# Altium PCB MB1293Cascii.PcbDoc (part 2 of 2)
Units mm, origin at the board's own origin, x right, y up, seen from the top; angles counter-clockwise.
Board outline 50.63 x 26.23 mm, 2 copper layers (Top Layer, Bottom Layer), stack 1.571 mm thick; 73 components, 55 nets, 560 pads, 45 vias.
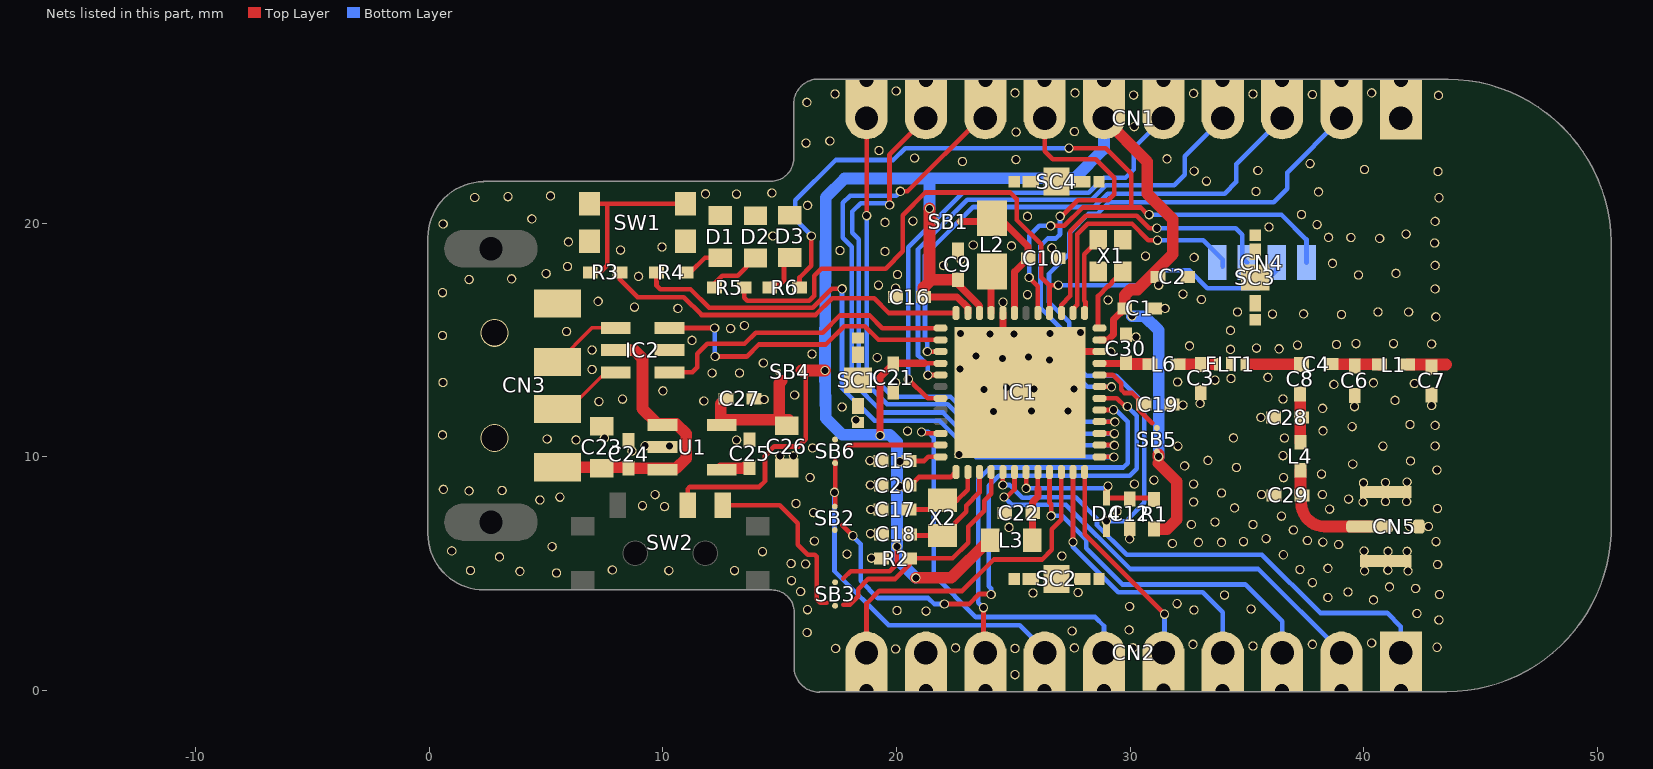
[diagram p2: the nets of this part, all layers, seen from the top]

## Via types
v1: diameter 0.4, hole 0.3, Top Layer to Bottom Layer, tented both sides, 45 vias

## Nets (pads, with @x,y where several pads share a name; then routed paths per layer and width w, separated by ;. In a path a pad name is that pad's centre, name@x,y a point inside that pad or via, vN(x,y) a via of type N, cw(c..) or ccw(c..) an arc to the next point about the centre after c; other vN are vias at no path point)
3V3: C1.2 C2.2 C9.1 C15.1 C16.1 C20.2 C21.2 CN1.6 IC1.1 IC1.23 IC1.34 IC1.35 IC1.40 IC1.48 L3.1 pad.2@28.88,26.121 pad.41 pad.42 pad.65 pad.582 R1.1 SB1.2 SB3.1 SB4.1 SB5.2 SW2.2 | length 95.1
  Top Layer w0.2: SW2.2@11.07,7.931 11.07,8.63 11.157,8.717 14.122,8.717 14.376,8.971 14.376,10.058 14.769,10.451 15.81,10.451 16.12,10.76 16.12,13.681 ; 17.729,4.801 18.039,5.11 19.71,5.11 20.015,5.415 v1(20.015,6.172) v1@20.015,6.177 ; C15.1@20.489,9.831 21.18,9.831 21.358,10.009 IC1.48@21.891,10.009 ; C20.2@20.499,8.691 20.949,9.141 22.322,9.141 IC1.1@22.543,9.362 ; 21.207,14.009 IC1.40@21.891,14.009
  Top Layer w0.3: pad.582@19.304,10.922 19.304,13.426 C21.2@19.863,13.985 19.889,14.011 21.207,14.011 ; C16.1@21.159,16.841 22.598,16.841 23.051,16.388 IC1.35@23.051,16.159 ; 21.412,17.506 21.488,17.582 ; C9.1@22.631,17.582 22.439,17.582 23.551,16.47 IC1.34@23.551,16.159 ; IC1.23@28.689,15.009 29.055,15.009 29.286,15.24 29.286,15.875 C1.2@29.769,16.358
  Top Layer w0.5: SB4.1@15.934,13.701 v1(16.942,13.701) ; v1(20.828,4.826) 22.345,4.826 23.96,6.441 L3.1@24.008,6.441 ; C16.1@21.159,16.841 21.159,17.252 21.412,17.506 v1(21.412,20.63) 21.412,20.096 21.463,20.046 21.59,20.046 ; 21.488,17.582 C9.1@22.439,17.582 ; CN1.6@28.88,24.491 30.734,22.636 30.734,21.26 31.826,20.168 31.826,18.669 30.325,17.168 30.021,17.168 29.769,16.916 C1.2@29.769,16.358 ; R1.1@31.02,6.916 31.025,6.911 31.574,6.911 31.99,7.326 31.99,8.951 31.21,9.731 ; v1@31.21,10.013 v1@31.21,10.109
  Bottom Layer w0.5: v1(20.015,6.172) 20.015,5.639 v1(20.828,4.826) ; v1@20.02,6.191 20.02,10.651 19.718,10.952 17.673,10.952 16.967,11.659 v1(16.942,13.701) 16.967,21.105 17.779,21.916 21.412,21.916 ; v1(21.412,20.63) 21.412,21.92 27.619,21.92 28.88,23.181 CN1.6@28.88,24.451 ; pad.65@30.074,16.027 30.607,16.027 31.217,15.418 v1(31.217,10.013)
  other v1: 31.217,17.348
5V_USB: C23.2 C24.2 CN3.1 IC2.5 U1.1 U1.3 | length 12.4
  Top Layer w0.5: CN3.1@5.5,9.561 C24.2@8.641,9.561 ; IC2.5@7.99,14.571 8.79,14.571 9.13,14.231 9.13,12.071 9.79,11.411 10.58,11.411 10.998,10.992 10.998,9.936 10.582,9.521 C24.2@8.681,9.521 ; C24.2@8.68,9.522 C24.2@8.681,9.521
ANT: C7.2 L1.2 | length 1.7
  Top Layer w0.4: 43.519,13.954 43.536,13.97
  Top Layer w0.5: L1.2@41.869,13.954 43.519,13.954
BOOT0: IC1.4 R2.1 SB3.2 SW2.3 | length 18
  Top Layer w0.2: SW2.3@12.57,7.931 15,7.931 15.77,7.161 15.77,6.248 16.201,5.818 16.509,5.818 16.586,5.74 16.586,3.912 16.739,3.759 17.018,3.759 ; 17.729,3.683 18.009,3.683 18.364,4.039 18.364,4.343 18.801,4.78 19.939,4.78 20.565,5.407 20.565,5.661 22.398,5.661 23.075,6.338 23.075,7.023 23.76,7.708 23.76,8.131 24.051,8.421 IC1.4@24.051,9.362
GND: C1.1 C2.1 C3.1 C6.2 C7.1 C9.2 C10.2 C12.2 C15.2 C16.2 C17.2 C18.2 C19.2 C20.1 C21.1 C22.2 C23.1 C24.1 C25.1 C26.1 C27.1 C28.2 C29.2 C30.1 CN1.1 CN2.9 CN3.0 CN3.4 CN5.2 D1.K D2.K D3.K FLT1.2 IC1.22 IC1.32 IC1.49 IC2.2 pad.2@21.26,-0.005 pad.2@41.58,26.136 pad.24 pad.25 pad.26 pad.27 pad.28 pad.29 pad.30 pad.31 pad.32 pad.33 pad.34 pad.35 pad.36 pad.37 pad.38 pad.39 pad.40 pad.43 pad.44 pad.45 pad.46 pad.47 pad.48 pad.49 pad.50 pad.51 pad.52 pad.53 pad.54 pad.55 pad.56 pad.57 pad.58 pad.59 pad.60 pad.61 pad.62 pad.63 pad.64 pad.69 pad.70 pad.71 pad.74 pad.76 pad.77 pad.78 pad.79 pad.80 pad.81 pad.82 pad.83 pad.84 pad.85 pad.86 pad.87 pad.88 pad.89 pad.90 pad.91 pad.92 pad.93 pad.94 pad.95 pad.96 pad.97 pad.99 pad.100 pad.101 pad.102 pad.103 pad.104 pad.105 pad.106 pad.107 pad.108 pad.109 pad.110 pad.111 pad.112 pad.113 pad.114 pad.115 pad.116 pad.117 pad.118 pad.119 pad.120 pad.121 pad.122 pad.123 pad.124 pad.125 pad.126 pad.127 pad.128 pad.129 pad.130 pad.131 pad.132 pad.133 pad.134 pad.135 pad.136 pad.137 pad.138 pad.139 pad.142 pad.143 pad.144 pad.145 pad.146 pad.147 pad.148 pad.149 pad.150 pad.151 pad.152 pad.153 pad.154 pad.155 pad.156 pad.157 pad.158 pad.159 pad.160 pad.161 pad.162 pad.163 pad.164 pad.165 pad.166 pad.167 pad.168 pad.169 pad.170 pad.171 pad.172 pad.173 pad.174 pad.175 pad.176 pad.177 pad.178 pad.179 pad.180 pad.181 pad.182 pad.183 pad.184 pad.185 pad.186 pad.187 pad.188 pad.189 pad.190 pad.191 pad.192 pad.193 pad.194 pad.195 pad.196 pad.197 pad.198 pad.199 pad.200 pad.201 pad.202 pad.203 pad.204 pad.205 pad.206 pad.207 pad.208 pad.209 pad.210 pad.211 pad.212 pad.213 pad.214 pad.215 pad.216 pad.217 pad.218 pad.219 pad.220 pad.221 pad.222 pad.223 pad.224 pad.225 pad.226 pad.227 pad.228 pad.229 pad.230 pad.231 pad.232 pad.233 pad.234 pad.235 pad.236 pad.237 pad.238 pad.239 pad.240 pad.241 pad.242 pad.243 pad.244 pad.245 pad.246 pad.247 pad.248 pad.249 pad.250 pad.251 pad.252 pad.253 pad.254 pad.255 pad.256 pad.257 pad.258 pad.259 pad.260 pad.261 pad.262 pad.263 pad.264 pad.265 pad.266 pad.267 pad.268 pad.269 pad.270 pad.271 pad.272 pad.273 pad.274 pad.275 pad.276 pad.277 pad.278 pad.279 pad.280 pad.281 pad.282 pad.283 pad.284 pad.285 pad.286 pad.287 pad.288 pad.289 pad.290 pad.291 pad.292 pad.293 pad.294 pad.295 pad.296 pad.297 pad.298 pad.299 pad.300 pad.301 pad.302 pad.303 pad.304 pad.305 pad.306 pad.307 pad.308 pad.309 pad.310 pad.311 pad.312 pad.313 pad.314 pad.315 pad.317 pad.318 pad.319 pad.320 pad.321 pad.323 pad.324 pad.325 pad.326 pad.327 pad.328 pad.329 pad.330 pad.583 pad.585 pad.586 pad.587 pad.588 pad.589 pad.590 R2.2 SC1.1 SC2.1 SC3.1 SC4.1 SW1.1 U1.2 X1.2 X1.4 | length 7.8
  Top Layer w0.3: IC1.32@24.551,16.159 24.551,13.5 IC1.49@25.29,12.761 27.038,14.509 IC1.22@28.689,14.509
NetC3_2: C3.2 FLT1.1 L6.2 | length 1.5
  Top Layer w0.5: L6.2@32.07,13.97 FLT1.1@33.604,13.97
NetC4_1: C4.1 C8.1 FLT1.3 | length 2.3
  Top Layer w0.5: 35.027,13.97 C4.1@37.331,13.97
NetC4_2: C4.2 C6.1 L1.1 | length 2.1
  Top Layer w0.5: C4.2@38.605,13.974 40.623,13.974 cw(c40.623,13.905) L1.1@40.671,13.954
NetC8_2: C8.2 C28.1 L4.1 | length 2.1
  Top Layer w0.5: C28.1@37.269,11.684 cw(c37.242,11.657) 37.28,11.657 L4.1@37.28,10.633 ; C28.1@37.27,11.685 C8.2@37.27,12.689
NetC10_1: C10.1 IC1.31 L2.1 SB1.1 | length 6.6
  Top Layer w0.3: SB1.1@22.725,20.071 23.94,20.071 L2.1@24.09,20.221 24.412,20.221 25.629,19.004 25.635,19.01 C10.1@25.635,18.501 25.072,17.937 25.051,17.937 IC1.31@25.051,16.159
NetC12_1: C12.1 D4.A IC1.7 R1.2 | length 6.8
  Top Layer w0.2: v1@25.551,8.661 IC1.7@25.551,9.362 ; v1(29.05,8.751) 28.98,8.681 D4.A@28.98,8.246 30.96,8.246 R1.2@31.02,8.186
  Bottom Layer w0.2: v1(25.55,8.661) 28.96,8.661 v1(29.05,8.751)
NetC17_1: C17.1 IC1.2 X2.1 | length 3.6
  Top Layer w0.2: C17.1@20.549,7.751 21.58,7.751 X2.1@21.97,8.141 22.59,8.141 23.051,8.601 IC1.2@23.051,9.362
NetC18_1: C18.1 IC1.3 X2.2 | length 4.8
  Top Layer w0.2: C18.1@20.559,6.691 20.609,6.641 X2.2@21.97,6.641 22.99,7.661 22.99,7.921 23.551,8.481 IC1.3@23.551,9.362
NetC19_1: C19.1 IC1.20 SB5.1 | length 3.5
  Top Layer w0.2: IC1.20@28.689,13.509 29.257,13.509 29.616,13.15 29.616,12.878 29.756,12.738 30.083,12.738 30.34,12.482 30.34,12.051 30.94,11.451
NetC22_1: C22.1 IC1.8 L3.2 | length 3
  Top Layer w0.2: 26.051,8.661 IC1.8@26.051,9.362
  Top Layer w0.3: L3.2@25.812,6.441 25.812,8.062 26.051,8.301 26.051,8.661
NetC25_2: C25.2 U1.4 | length 1
  Top Layer w0.5: U1.4@12.48,9.521 13.459,9.521 C25.2@13.47,9.532
NetC26_2: C26.2 C27.2 SB4.2 U1.5 | length 5.9
  Top Layer w0.5: C27.2@12.701,12.491 12.48,12.27 12.48,11.421 12.65,11.591 C26.2@14.98,11.591 ; 15.088,13.259 14.98,13.151 C26.2@14.98,11.591 ; C26.2@15.392,11.591 C26.2@14.98,11.591
NetC29_1: C29.1 CN5.1 L4.2 | length 4.9
  Top Layer w0.5: L4.2@37.289,9.426 37.289,8.394 37.32,8.363 37.32,8.024 ccw(c38.32,8.024) 38.32,7.024 CN5.1@40.244,7.024
NetC30_2: C30.2 IC1.21 L6.1 | length 2.1
  Top Layer w0.3: IC1.21@28.689,14.009 C30.2@29.87,14.009
  Top Layer w0.5: C30.2@29.87,13.981 L6.1@30.836,13.981
NetCN2_7: CN2.7 pad.2@26.34,-0.005 SB2.1 SB6.1 | length 17.4
  Top Layer w0.2: SB2.1@17.374,7.917 17.374,9.863
  Bottom Layer w0.2: v1(17.348,8.484) 17.348,5.105 19.66,2.794 25.273,2.794 26.34,1.727 CN2.7@26.34,1.631 pad.2@26.34,-0.005
NetCN3_2: CN3.2 IC2.6 | length 3.1
  Top Layer w0.15: CN3.2@5.5,12.061 6,12.061 7.56,13.621 IC2.6@7.99,13.621
NetCN3_3: CN3.3 IC2.4 | length 3.1
  Top Layer w0.15: CN3.3@5.5,14.061 6.96,15.521 IC2.4@7.99,15.521
NetCN4_1: CN4.1 IC1.26 | length 10.8
  Top Layer w0.2: IC1.26@27.551,16.159 27.551,16.317 27.74,16.506 27.74,19.538 28.186,19.983 30.077,19.983 30.782,19.279 v1(31.166,19.279)
  Bottom Layer w0.2: v1(31.166,19.279) 33.122,19.279 33.96,18.44 CN4.1@33.96,18.141
NetCN4_2: CN4.2 IC1.27 | length 12.9
  Top Layer w0.2: IC1.27@27.051,16.159 27.051,16.501 27.44,16.891 27.44,19.662 28.098,20.32 30.277,20.32 30.81,19.787 v1(31.14,19.787)
  Bottom Layer w0.2: v1(31.14,19.787) 34.519,19.787 34.794,19.511 34.794,18.521 CN4.2@35.001,18.313
NetD1_A: D1.A R4.2 | length 1.7
  Top Layer w0.15: R4.2@11.005,17.901 R4.2@11.18,17.901
  Top Layer w0.2: R4.2@11.18,17.901 11.807,18.528 D1.A@12.466,18.528
NetD2_A: D2.A R5.2 | length 2.5
  Top Layer w0.2: R5.2@12.116,17.145 12.116,17.323 12.548,17.755 13.203,17.755 D2.A@13.966,18.518
NetD3_A: D3.A R6.2 | length 1.7
  Top Layer w0.2: R6.2@14.605,17.399 15.037,17.399 15.189,17.551 15.189,18.301 D3.A@15.426,18.538
NetIC1_24: IC1.24 X1.3 | length 2.9
  Top Layer w0.2: IC1.24@28.689,15.509 28.626,15.572 28.626,16.885 29.059,17.318 29.092,17.318 29.209,17.435 29.209,17.468 X1.3@29.684,17.943
NetIC1_25: IC1.25 X1.1 | length 3.5
  Top Layer w0.2: IC1.25@28.051,16.159 28.09,16.198 28.09,16.628 28.04,16.678 28.04,18.667 X1.1@28.702,19.329
NetIC1_33: IC1.33 L2.2 | length 2.3
  Top Layer w0.3: L2.2@23.72,17.661 24.051,17.661 IC1.33@24.051,16.159 ; L2.2@24.09,17.935 L2.2@24.09,18.389
NetR3_1: R3.1 SW1.2 | length 7.6
  Top Layer w0.2: SW1.2@6.87,20.831 7.63,20.831 ; R3.1@6.895,17.901 7.33,17.901 7.63,18.201 7.63,20.831 ; SW1.2@10.97,20.831 7.63,20.831
NRST: CN1.2 D4.K pad.2@39.04,26.136 | length 32
  Top Layer w0.2: CN1.2@39.04,24.491 pad.2@39.04,26.136
  Bottom Layer w0.2: v1(28.98,7.251) 29.82,7.251 30.607,8.038 30.607,12.273 29.41,13.471 28.121,13.471 27.39,14.202 27.39,15.765 26.524,16.631 26.524,17.829 27.39,18.694 27.39,19.571 28.217,20.397 28.591,20.397 29.094,20.901 36.141,20.901 36.72,21.48 36.72,22.171 CN1.2@39.04,24.491
PA0: CN2.3 IC1.9 pad.2@36.5,-0.005 | length 15.2
  Top Layer w0.2: IC1.9@26.551,9.362 26.551,8.051 26.62,7.981 v1(26.62,7.481)
  Bottom Layer w0.2: v1(26.62,7.481) 27.089,7.481 28.118,6.452 28.118,6.096 29.667,4.547 34.925,4.547 36.5,2.972 CN2.3@36.5,1.631
PA1: CN2.10 IC1.10 pad.2@18.72,-0.005 | length 14.7
  Top Layer w0.2: pad.2@18.72,1.422 18.72,3.731 19.256,4.267 22.809,4.267 24.155,5.613 26.238,5.613 26.65,6.025 26.65,6.911 27.051,7.311 IC1.10@27.051,9.362
PA2: CN2.4 IC1.11 pad.2@33.96,-0.005 | length 12.5
  Top Layer w0.2: v1(27.55,6.361) IC1.11@27.551,9.362
  Bottom Layer w0.2: v1(27.55,6.361) 27.55,6.156 29.489,4.216 33.096,4.216 33.96,3.353 CN2.4@33.96,1.631
PA3: CN2.5 IC1.12 pad.2@31.42,0.01 | length 9.2
  Top Layer w0.2: IC1.12@28.051,9.362 28.051,6.7 29.23,5.521 29.23,5.517 v1(31.471,3.277)
  Bottom Layer w0.2: CN2.5@31.42,1.631 31.471,1.681 v1(31.471,3.277)
PA4: IC1.13 R4.1 | length 27
  Top Layer w0.2: R4.1@9.735,17.901 9.735,17.336 9.9,17.17 11.187,17.17 11.979,16.378 16.411,16.378 17.229,17.196 v1(17.678,17.196) ; IC1.13@28.689,10.009 29.298,10.009 29.3,10.007 v1(29.3,10.001)
  Bottom Layer w0.2: v1(17.678,17.196) 17.67,17.187 17.67,12.942 19.061,11.551 21.84,11.551 23.39,10.001 v1(29.3,10.001) v1@29.31,10.011
PA5: CN1.8 IC1.14 pad.2@23.8,26.136 | length 29.8
  Top Layer w0.2: v1(20.168,21.366) 20.472,21.366 23.597,24.491 CN1.8@23.8,24.491 pad.2@23.8,25.872 ; IC1.14@28.689,10.509 29.318,10.509 29.32,10.507 v1(29.32,10.501)
  Bottom Layer w0.2: v1(20.168,21.366) 19.983,21.182 18.013,21.182 17.704,20.873 17.704,19.385 18.09,18.999 18.09,16.345 18.09,13.234 19.423,11.901 21.99,11.901 23.39,10.501 v1(29.32,10.501)
PA6: CN1.9 IC1.15 pad.2@21.26,26.136 | length 28.9
  Top Layer w0.2: v1@19.7,20.793 v1(19.71,20.782) ; v1@19.7,20.851 19.7,22.931 CN1.9@21.26,24.491 pad.2@21.26,26.136 ; IC1.15@28.689,11.009 29.318,11.009 29.32,11.007 v1(29.32,11.001)
  Bottom Layer w0.2: v1(19.71,20.782) 19.71,20.858 18.465,20.858 18.11,20.504 18.11,19.588 18.39,19.309 18.39,16.221 18.39,13.467 19.596,12.261 22.2,12.261 23.46,11.001 v1(29.32,11.001) ; CN1.9@21.26,24.491 pad.2@21.26,25.872
PA7: CN1.10 IC1.16 pad.2@18.72,26.136 | length 24.4
  Top Layer w0.2: pad.2@18.72,25.872 CN1.10@18.72,24.491 18.726,24.485 v1(18.726,20.326) ; IC1.16@28.689,11.509 29.331,11.509 v1(29.34,11.501)
  Bottom Layer w0.2: v1(18.726,20.326) 18.726,13.69 19.843,12.573 22.312,12.573 23.384,11.501 v1(29.34,11.501)
PA8: CN2.8 IC1.17 pad.2@23.8,-0.005 | length 17.5
  Top Layer w0.2: v1(23.724,3.556) 23.724,1.758 23.825,1.656 CN2.8@23.8,1.631 ; IC1.17@28.689,12.009 29.298,12.009 v1(29.287,12.021)
  Bottom Layer w0.2: v1(23.724,3.556) 23.698,3.556 23.495,3.759 23.495,9.042 24.003,9.55 29.71,9.55 29.89,9.731 29.89,11.516 29.385,12.021 v1(29.287,12.021)
PA9: IC1.18 SB2.2 | length 24.5
  Top Layer w0.2: 17.678,7.087 v1(18.136,6.629) ; v1(22.047,3.708) 23.114,3.708 23.546,4.14 23.927,4.14 v1@24.054,4.013 ; IC1.18@28.689,12.509 29.431,12.509 29.78,12.161 v1(29.88,12.161)
  Bottom Layer w0.2: v1(18.136,6.629) 18.136,6.604 18.466,6.274 18.466,4.699 19.202,3.962 21.361,3.962 21.615,3.708 v1(22.047,3.708) v1@22.123,3.632 ; v1(24.054,4.115) 24.054,4.369 23.952,4.47 23.952,8.769 24.384,9.201 29.978,9.201 30.277,9.5 30.277,11.764 v1(29.88,12.161)
PA10: IC1.36 R3.2 | length 15.9
  Top Layer w0.2: R3.2@8.165,17.901 8.165,17.596 8.92,16.84 10.898,16.84 11.66,16.078 16.535,16.078 17.247,16.789 19.05,16.789 19.68,16.159 IC1.36@22.551,16.159
PA13: CN1.3 IC1.39 pad.2@36.5,26.136 | length 22.9
  Top Layer w0.2: v1(21.32,14.511) 21.321,14.509 IC1.39@21.891,14.509
  Bottom Layer w0.2: v1(21.32,14.511) 21.32,14.921 21.22,15.021 21.22,18.634 23.285,20.7 25.718,20.7 25.72,20.697 26.482,20.697 26.484,20.7 27.191,20.7 27.193,20.697 28.467,20.697 29.034,21.265 34.041,21.265 34.544,21.768 34.544,22.535 CN1.3@36.5,24.491
PA14: CN1.4 IC1.41 pad.2@33.96,26.136 | length 21.9
  Top Layer w0.2: v1(21.34,13.501) 21.348,13.509 IC1.41@21.891,13.509
  Bottom Layer w0.2: v1(21.34,13.501) 21.34,13.925 20.92,14.345 20.92,18.893 23.027,21 28.345,21 28.965,21.62 31.882,21.62 32.341,22.079 32.341,22.871 CN1.4@33.96,24.491
PB0: CN4.3 IC1.28 R5.1 | length 32.4
  Top Layer w0.2: R5.1@13.487,17.247 13.487,16.815 13.624,16.678 16.272,16.678 16.485,16.891 16.485,17.755 16.789,18.059 19.533,18.059 20.269,18.796 20.269,20.345 21.239,21.316 24.867,21.316 25.146,21.036 25.146,20.14 26.194,19.093 26.194,17.697 26.543,17.348 v1(26.924,17.348) 26.594,17.348 26.551,17.305 IC1.28@26.551,16.159
  Bottom Layer w0.2: v1(26.924,17.348) 30.404,17.348 31.039,17.983 32.537,17.983 33.299,17.221 35.509,17.221 36.271,17.983 CN4.3@36.271,18.313
PB1: CN4.4 IC1.29 R6.1 | length 38.8
  Top Layer w0.2: R6.1@15.85,17.247 15.85,17.678 16.358,18.186 v1(16.358,19.456) ; v1(25.679,17.678) 26.051,17.307 IC1.29@26.051,16.159 ; v1@26.594,19.895 27.184,19.895 27.965,20.676 30.048,20.676 ; v1(27.381,23.216) 28.956,23.216 30.048,22.123 30.048,20.676 ; v1(30.81,20.371) 30.759,20.371 30.455,20.676 30.048,20.676
  Bottom Layer w0.2: v1(16.358,19.456) 16.358,19.482 15.672,20.168 15.672,20.98 17.399,22.708 19.863,22.708 20.371,23.216 v1(27.381,23.216) ; v1(25.679,17.678) 25.679,19.456 26.111,19.888 v1(26.594,19.888) ; v1(30.81,20.371) 36.474,20.371 37.541,19.304 CN4.4@37.541,18.313
PB2: CN1.7 IC1.19 pad.2@26.34,26.136 | length 19.9
  Top Layer w0.2: pad.2@26.34,25.872 CN1.7@26.34,24.491 26.34,23.089 26.695,22.733 28.524,22.733 29.312,21.946 29.312,21.234 29.057,20.98 27.762,20.98 27.076,20.295 v1(27,20.295) ; IC1.19@28.689,13.009 29.191,13.009 v1(29.2,13.001)
  Bottom Layer w0.2: v1(27,20.295) 27,19.533 26.816,19.348 26.479,19.348 26.162,19.031 26.162,16.383 27.05,15.495 27.05,14.118 28.167,13.001 v1(29.2,13.001)
PB3: CN1.5 IC1.43 pad.2@31.42,26.136 | length 21.1
  Top Layer w0.2: v1(20.51,13.331) 21.331,12.509 IC1.43@21.891,12.509
  Bottom Layer w0.2: v1(20.51,13.331) 20.51,18.965 22.844,21.3 28.22,21.3 28.871,21.951 29.799,21.951 30.15,22.301 30.15,23.221 CN1.5@31.42,24.491
PB6: CN2.6 IC1.46 pad.2@28.88,-0.005 | length 18.1
  Top Layer w0.2: v1(21.07,11.071) 21.131,11.009 IC1.46@21.891,11.009
  Bottom Layer w0.2: v1(21.07,11.071) 21.35,11.071 21.59,10.831 21.59,4.953 23.393,3.15 28.499,3.15 28.88,2.769 CN2.6@28.88,1.631 pad.2@28.88,0.25
PB7: IC1.47 SB6.2 | length 4
  Top Layer w0.2: 17.874,10.479 17.904,10.509 IC1.47@21.891,10.509
PB8: CN2.1 IC1.5 pad.2@41.58,-0.005 | length 22.8
  Top Layer w0.2: v1(24.55,8.801) IC1.5@24.551,9.362
  Bottom Layer w0.2: v1(24.55,8.801) 24.844,8.801 25.384,8.261 25.715,8.261 25.725,8.271 27.67,8.271 28.58,7.361 28.58,7.085 29.848,5.817 35.636,5.817 38.125,3.327 40.996,3.327 41.58,2.743 CN2.1@41.58,1.631 pad.2@41.58,0.25
PB9: CN2.2 IC1.6 pad.2@39.04,-0.005 | length 18.5
  Top Layer w0.2: v1(24.6,8.291) 24.73,8.291 25.051,8.611 IC1.6@25.051,9.362
  Bottom Layer w0.2: v1(24.6,8.291) 24.93,7.961 27.25,7.961 30.003,5.207 35.483,5.207 CN2.2@39.05,1.641
USB_N: IC1.37 IC2.1 | length 13.2
  Top Layer w0.2: IC2.1@10.29,13.621 11.27,13.621 11.48,13.831 11.48,14.421 11.9,14.841 13.498,14.841 13.973,15.316 16.84,15.316 17.577,16.053 18.847,16.053 19.391,15.509 IC1.37@21.891,15.509
USB_P: IC1.38 IC2.3 | length 13.6
  Top Layer w0.2: IC2.3@10.29,15.521 v1(12.22,15.521) ; v1(12.243,14.298) 13.597,14.298 14.112,14.813 16.979,14.813 17.762,15.596 18.644,15.596 19.23,15.009 IC1.38@21.891,15.009
  Bottom Layer w0.2: v1@12.22,14.311 v1(12.22,15.521)
pads on no net: CN3.5 IC1.30 IC1.42 IC1.44 IC1.45 SW2.0 SW2.1

## Polygon pours and split planes (outlines as drawn)
GND on Top Layer "GND_L01_P012" (solid, remove dead copper, pour order 12): 0.102,19.38 cw(c2.438,19.38) 2.438,21.717 2.464,21.717 14.681,21.717 ccw(c14.681,21.768) 14.732,21.768 ccw(c14.732,22.784) 15.748,22.784 15.748,25.07 cw(c15.773,25.07) 15.773,25.095 15.773,25.121 cw(c16.789,25.121) 16.789,26.137 43.688,26.137 43.688,0.025 cw(c43.663,0.025) 43.663,0 16.789,0 cw(c16.789,1.016) 15.773,1.016 15.773,3.327 15.773,3.378 ccw(c14.783,3.378) 14.783,4.369 2.464,4.369 2.438,4.369 cw(c2.438,6.706) 0.102,6.706 0.102,19.355 cw(c0.127,19.355) 0.127,19.38
ANT on Top Layer "L2-No Net" (solid, pour order 0): 43.525,13.764 45.15,13.764 45.15,16.239 45.875,16.239 45.875,7.314 47.525,7.314 47.525,16.239 48.25,16.239 48.25,7.289 49.925,7.289 49.925,14.264 49.475,14.264 49.475,9.864 49.475,7.764 48.725,7.764 48.725,16.689 48.675,16.689 47.05,16.689 47.05,16.664 47.05,7.789 46.675,7.789 46.3,7.789 46.3,7.864 46.3,16.689 46.275,16.689 44.65,16.689 44.65,16.664 44.65,14.164 43.5,14.164 43.5,13.764
GND on Bottom Layer "GND_L02_P014" (solid, remove dead copper, pour order 14): 0.117,19.439 cw(c2.454,19.439) 2.454,21.776 2.479,21.776 14.697,21.776 ccw(c14.697,21.827) 14.747,21.827 ccw(c14.747,22.843) 15.763,22.843 15.763,25.129 cw(c15.789,25.129) 15.789,25.154 15.789,25.18 cw(c16.805,25.18) 16.805,26.196 43.703,26.196 43.703,0.085 cw(c43.678,0.085) 43.678,0.059 16.805,0.059 cw(c16.805,1.075) 15.789,1.075 15.789,3.387 15.789,3.437 ccw(c14.798,3.437) 14.798,4.428 2.479,4.428 2.454,4.428 cw(c2.454,6.765) 0.117,6.765 0.117,19.414 cw(c0.142,19.414) 0.142,19.439

## Keep-outs
Keep-Out Layer:
  lines w0.1: 0,6.716 0,19.377 cw(c2.356,19.377) 2.356,21.733 ; -0.001,6.716 ccw(c2.355,6.716) 2.355,4.361 ; 2.345,4.371 14.66,4.371 ; 2.356,21.743 3.87,21.743 ; 3.87,21.751 14.63,21.751 ; 14.63,21.751 ccw(c14.63,22.771) 15.65,22.771 ; 14.66,4.361 cw(c14.66,3.341) 15.68,3.341 ; 15.65,25.101 cw(c16.67,25.101) 16.67,26.121 43.568,26.122 ; 15.65,25.202 15.65,22.771 ; 15.67,1.01 ccw(c16.69,1.01) 16.69,-0.01 ; 15.675,1.01 15.675,3.341 ; 16.69,0 43.54,0 ; 43.528,26.118 cw(c43.528,19.118) 50.528,19.118 ; 43.53,0.001 ccw(c43.53,7.001) 50.53,7.001 50.53,19.178 ; 15.65,22.77 ccw(c15.65,22.771) 15.65,22.771

## Silkscreen, mask and mechanical layers (free items; w line width, h text height)
Top Overlay:
  rectangle: 40.956,21.45 42.516,22.05
  lines w0.1: 16.51,6.02 16.513,5.232 ; 16.535,3.124 16.537,2.845 ; 16.547,8.407 16.547,24.232 ; 27.63,23.081 27.65,23.061 ; 27.635,25.888 27.66,25.863 27.66,22.081 42.977,22.081 42.977,23.094 ; 42.642,1.686 43.632,2.29 ; 42.642,1.711 43.632,1.185 ; 42.769,1.749 42.87,1.597 42.819,1.8 ; 42.819,1.775 42.896,1.8 ; 42.819,24.601 42.921,24.448 42.87,24.652 42.946,24.677 42.921,24.474 42.946,24.448 42.972,24.652 43.023,24.702 42.972,24.423 43.023,24.398 43.048,24.728 43.099,24.728 43.099,24.448 43.124,24.423 43.15,24.779 43.226,24.829 43.175,24.372 43.226,24.347 43.277,24.855 43.327,24.88 43.277,24.296 43.353,24.245 43.378,24.956 43.454,24.982 43.429,24.194 43.505,24.169 43.531,24.855 43.454,24.956 43.581,25.007 43.454,24.22 43.607,24.169 43.632,25.033 43.556,24.22 43.683,24.036 ; 42.896,1.826 42.87,1.622 42.896,1.597 42.921,1.8 ; 42.921,1.775 42.972,1.826 ; 42.972,1.851 42.921,1.572 42.972,1.546 42.997,1.876 ; 42.997,1.851 43.048,1.851 ; 43.048,1.876 43.048,1.597 43.073,1.572 43.099,1.927 ; 43.099,1.902 43.175,1.953 ; 43.175,1.978 43.124,1.521 43.175,1.495 43.226,2.003 ; 43.226,1.978 43.277,2.003 ; 43.277,2.029 43.226,1.445 43.302,1.394 43.327,2.105 ; 43.327,2.156 43.404,2.181 ; 43.404,2.08 43.48,1.978 ; 43.404,2.13 43.378,1.343 43.454,1.318 43.48,2.003 ; 43.404,2.156 43.531,2.207 ; 43.5,5.641 43.5,23.311 ; 43.531,2.156 43.404,1.368 43.556,1.318 43.581,2.181 43.505,1.368 43.632,1.185 ; 43.632,2.315 43.632,1.185 ; 43.683,24.036 43.683,25.166 42.692,24.563 43.683,24.036
  lines w0.35: 18.35,4.78 35.35,4.78 35.35,21.78 18.35,21.78 18.35,4.78
  text "PB2" at 25.883,22.428 h0.51
  text "NRST" at 38.202,22.301 h0.62
  text "PB3" at 30.709,22.276 h0.62
  text "PA14" at 32.969,22.276 h0.62
  text "PA13" at 35.611,22.276 h0.62
  text "GND" at 40.97,22.276 h0.62
  text "3V3" at 28.092,22.25 h0.62
  text "PA6" at 20.396,22.174 h0.62
  text "PA5" at 23.165,22.149 h0.62
  text "PA7" at 17.628,22.123 h0.62
  text "DEBUG" at 37.109,21.184 h0.75
  text "MB1293C" at 36.424,19.456 h1.6
  text "1" at 14.3,5.436 h2
  text "0" at 5.588,5.385 h2
  text "BOOT0" at 15.85,4.47 h0.75 r90
  text "PB6" at 28.829,3.302 h0.62
  text "PA3" at 30.683,3.302 h0.62
  text "PA9/PB7" at 24.638,3.277 h0.62
  text "PA2" at 33.325,3.282 h0.62
  text "PA0" at 35.865,3.256 h0.62
  text "PB9" at 38.405,3.256 h0.62
  text "PB8" at 40.919,3.256 h0.62
  text "PA1" at 18.11,3.226 h0.62
  text "PA8" at 22.555,3.226 h0.62
  text "GND" at 20.193,3.2 h0.62
Bottom Overlay:
  text "MB1293C" at 42.164,21.209 h2
  text "AT3" at 37.73,17.183 h0.51 r90
  text "AT0" at 33.92,17.157 h0.51 r90
  text "AT1" at 35.19,17.157 h0.51 r90
  text "Analog Test" at 41.885,17.145 h0.6
  text "AT2" at 36.435,17.132 h0.51 r90
  text "(Reserved)" at 41.758,12.573 h0.6
  text "USB_USER" at 0.723,9.741 h1 r270
Mechanical 1:
  lines w0.05: -18.4,19.211 -14.9,19.211 -14.9,22.181 ; -17.08,7.241 -17.08,7.221 -14.9,7.221 -14.9,3.661
Mechanical Edge:
  lines w0.1: 0,6.716 0,19.377 cw(c2.356,19.377) 2.356,21.733 ; -0.001,6.716 ccw(c2.355,6.716) 2.355,4.361 ; 2.345,4.371 14.66,4.371 ; 2.356,21.743 3.87,21.743 ; 3.87,21.751 14.63,21.751 ; 14.63,21.751 ccw(c14.63,22.771) 15.65,22.771 ; 14.66,4.361 cw(c14.66,3.341) 15.68,3.341 ; 15.67,1.01 ccw(c16.69,1.01) 16.69,-0.01 ; 15.675,1.01 15.675,3.341 ; 16.69,0 43.54,0 ; 43.528,26.118 cw(c43.528,19.118) 50.528,19.118 ; 43.53,0.001 ccw(c43.53,7.001) 50.53,7.001 ; 43.568,26.122 16.67,26.122 ccw(c16.67,25.101) 15.65,25.101 15.65,22.771 ; 50.53,6.711 50.53,19.178 ; 15.65,22.77 ccw(c15.65,22.771) 15.65,22.771
Mechanical:
  lines w0.1: -10.592,0 16.942,0 ; -10.541,4.371 2.388,4.371 ; -10.262,21.751 14.605,21.751 ; 0,-1.265 0,7.066 ; 0,20.128 0,42 ; 15.65,24.968 15.65,38.811 ; 16.561,-2.687 16.561,1.758 ; 18.72,24.491 18.72,32.182 ; 21.26,24.491 21.26,32.182 ; 41.58,1.631 61.189,1.631 ; 41.58,32.868 41.58,24.491 54.839,24.491 ; 42.037,0 62.535,0 ; 43.235,26.122 62.89,26.122 ; 43.541,-2.207 43.541,2.238 ; 50.53,-3.983 50.53,42
  text "(Module Part)" at 21.59,-5.156 h1.54
Top designator:
  lines w0.1: 17.958,6.248 17.958,6.454 18.848,7.344 ; 18.11,5.588 18.171,5.588 18.868,6.284 ; 18.11,8.992 18.672,8.992 18.858,9.177

## Text inside footprints (layer, text, board x,y; h text height)
Label_2: Bottom Overlay "RoHS" at 27.893,13.254 h1.6; Bottom Overlay "COMPLIANT" at 28.293,11.854 h0.8; Bottom Overlay "2002/95/EC" at 28.793,10.554 h0.8
Label_4: Bottom Overlay "STM32" at 11.905,10.466 h1.5